# Altium PCB MCU.PcbDoc
Units mm, origin at the board's own origin, x right, y up, seen from the top; angles counter-clockwise.
Board outline 50 x 50.04 mm, 4 copper layers (Top Layer, Int1 (GND), Int2 (PWR), Bottom Layer), stack 1.369 mm thick; 49 components, 51 nets, 231 pads, 142 vias.
Unrouted connection lines stored in the file: 2.
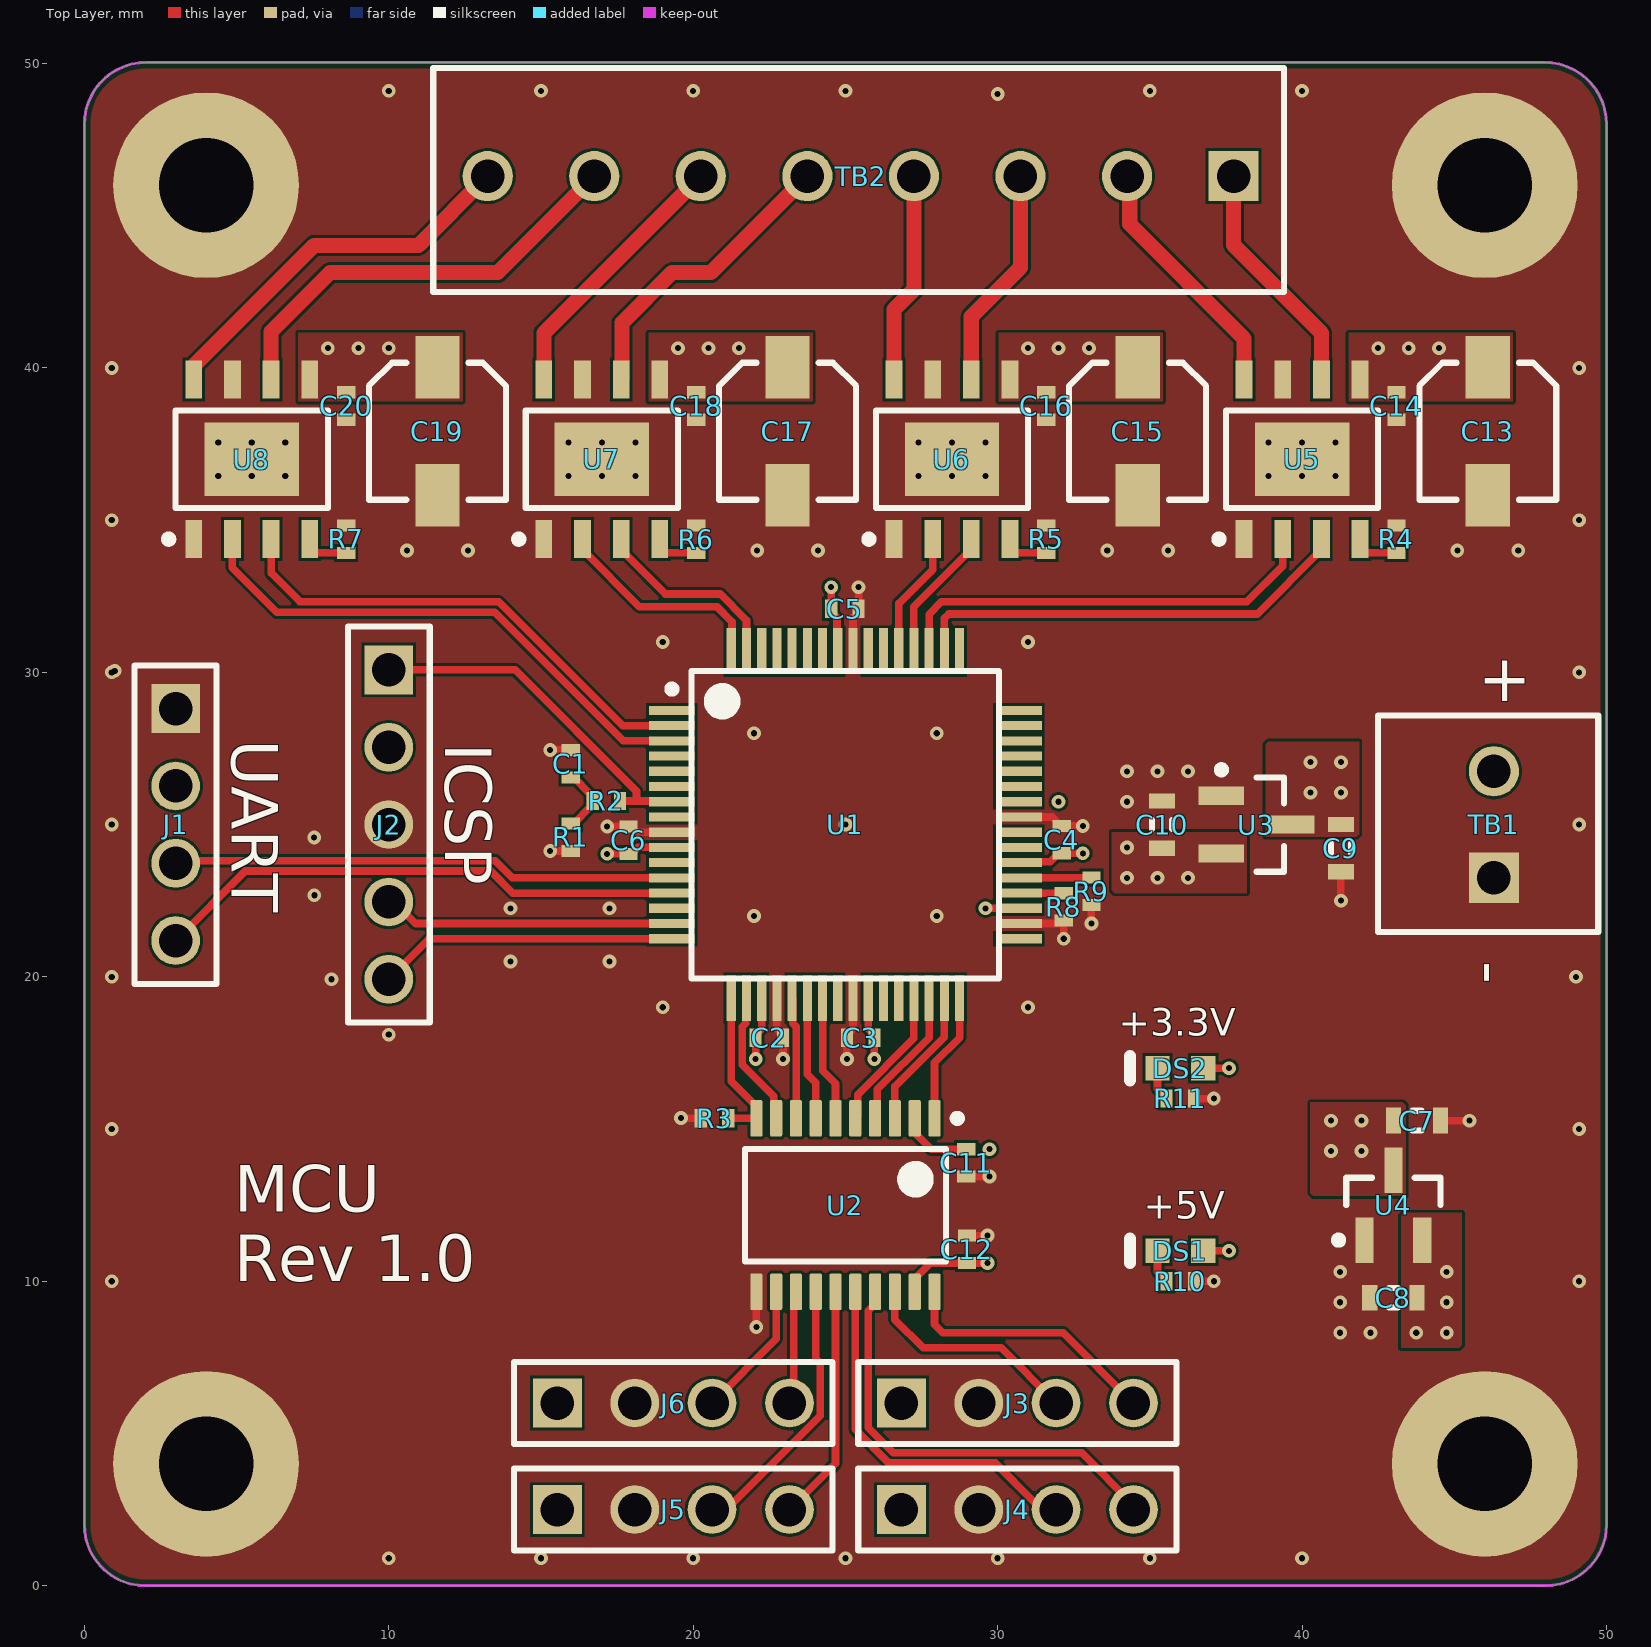
[diagram p0: Top Layer view]
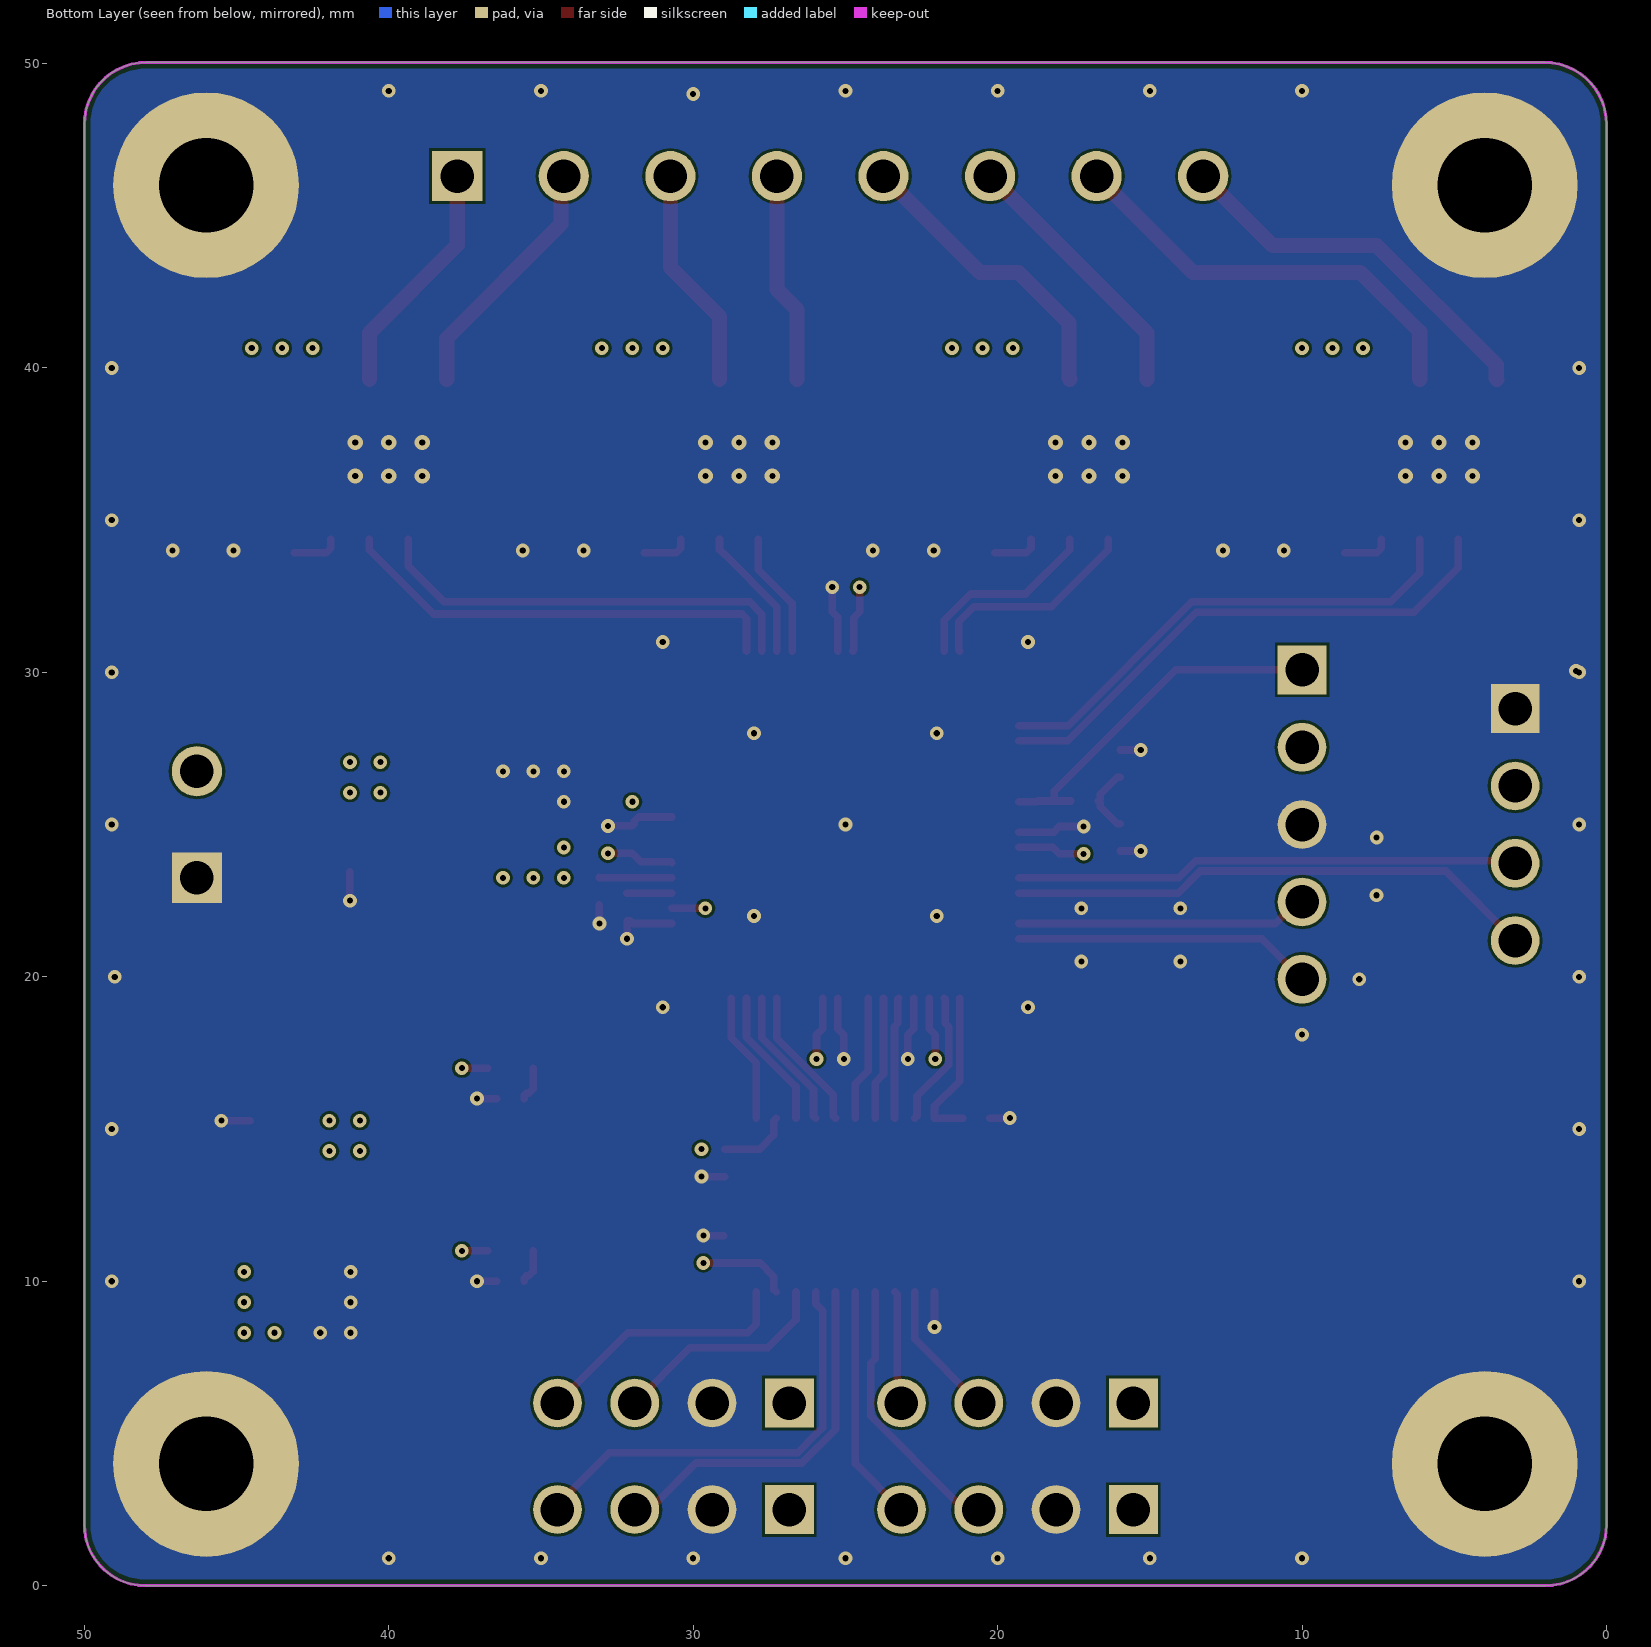
[diagram p1: Bottom Layer view, seen from below]
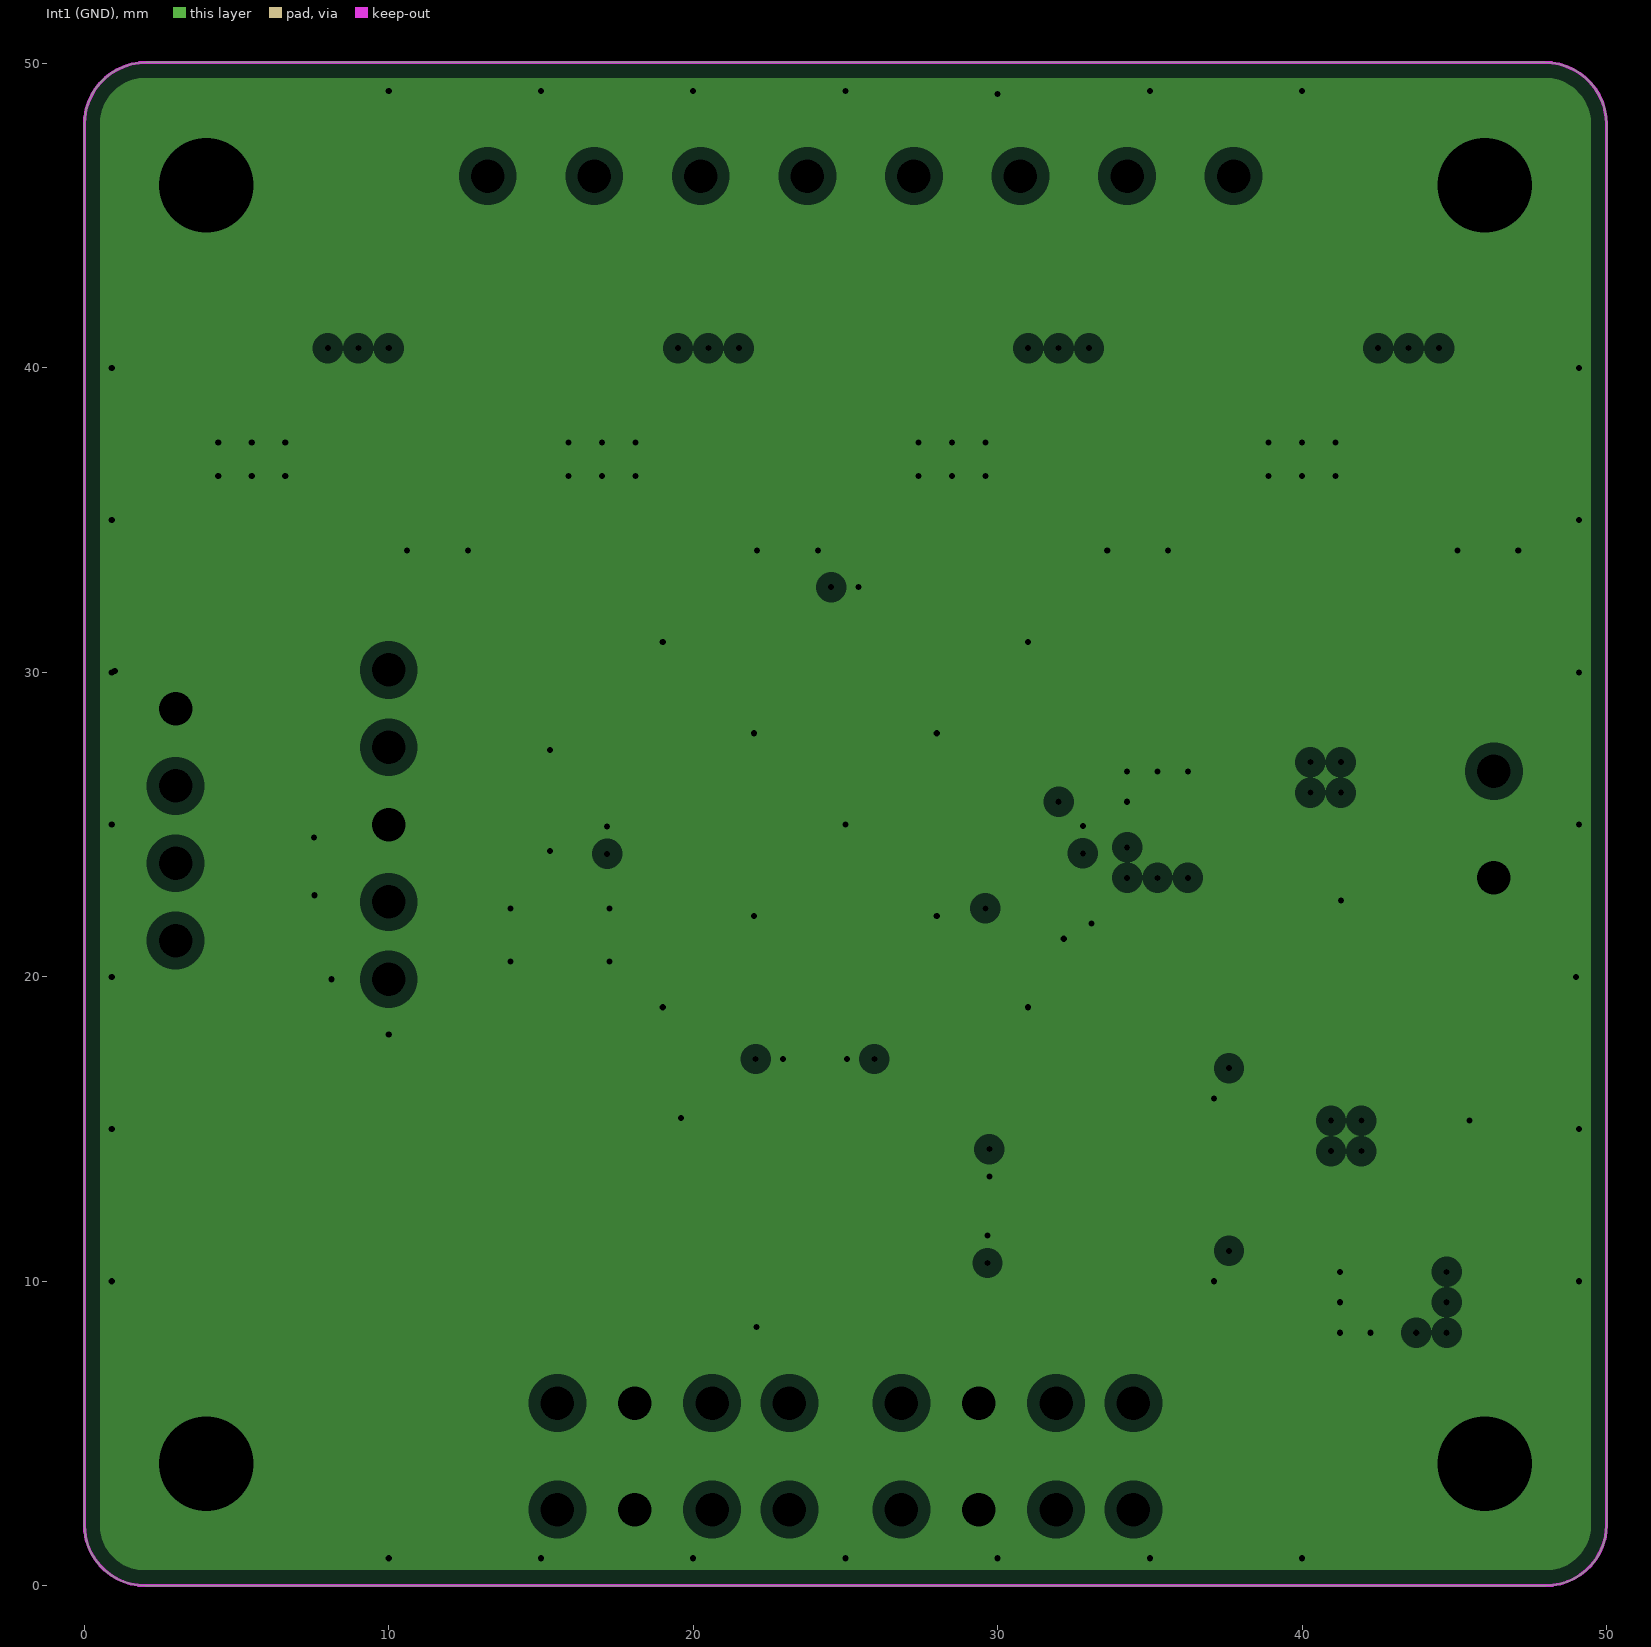
[diagram p2: Int1 (GND), clearances drawn from the general rule]
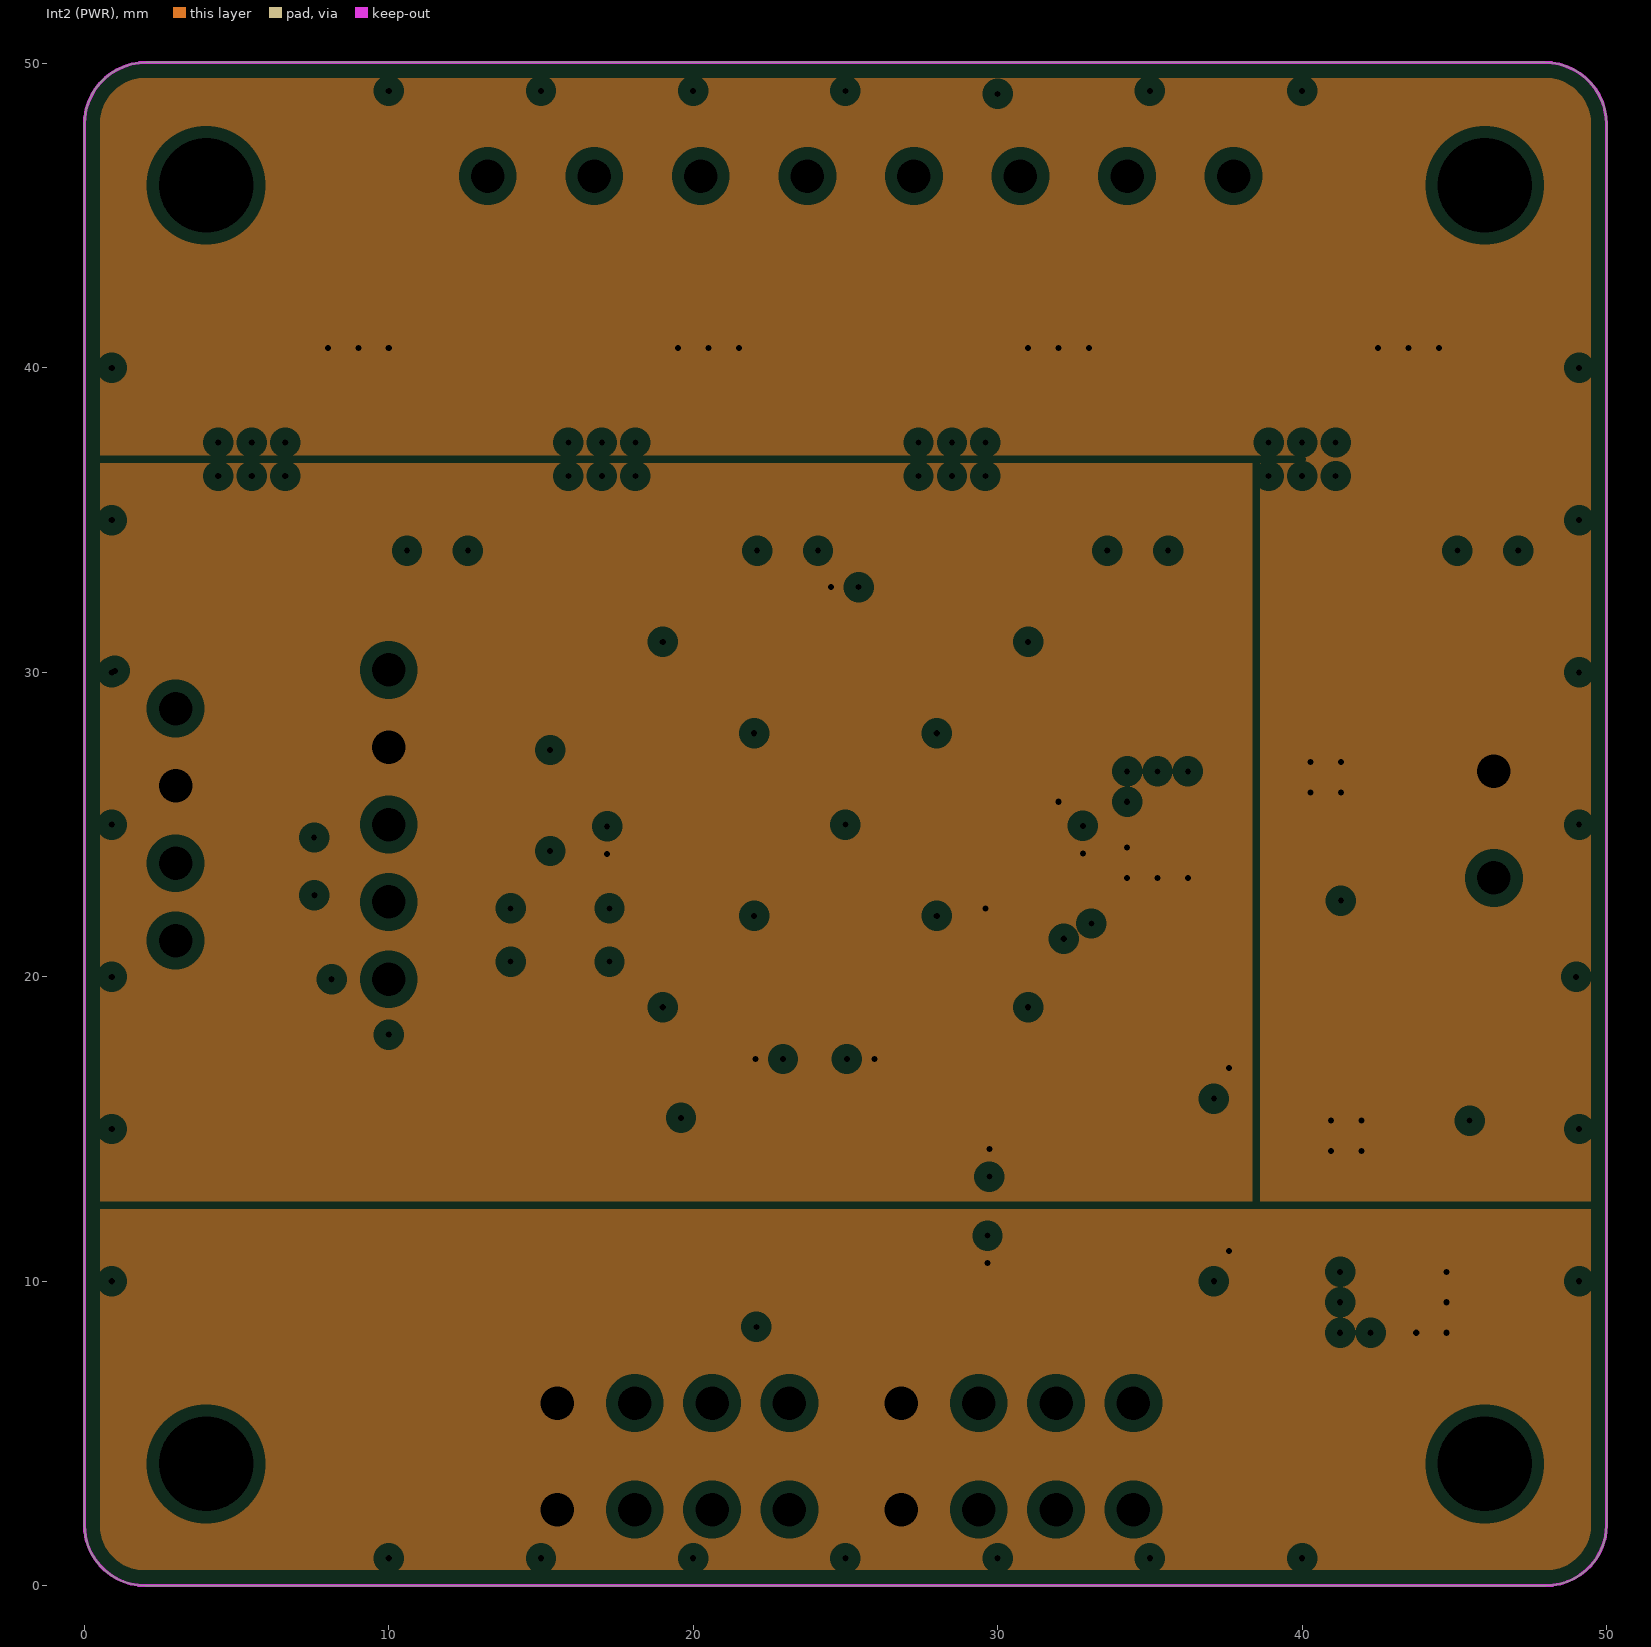
[diagram p3: Int2 (PWR), clearances drawn from the general rule]

## Layer stack, top to bottom
Top Solder: solder mask 0.0254, SM-001, Dk 4
Top Layer: signal copper 0.035
Dielectric 1: prepreg 0.1295, PP-017, Dk 4.3
Dielectric 2: prepreg 0.1295, PP-017, Dk 4.3
Int1 (GND): plane copper 0.035, net GND
Dielectric 3: core 0.7112, Core-039, Dk 4.8
Int2 (PWR): plane copper 0.035
Dielectric 4: prepreg 0.1295, PP-017, Dk 4.3
Dielectric 5: prepreg 0.1295, PP-017, Dk 4.3
Bottom Layer: signal copper 0.035
Bottom Solder: solder mask 0.0254, SM-001, Dk 4

## Board outline
2,0 48,0 ccw(c48,2) 50,2 50,48 ccw(c47.962,48) 47.962,50.038 2.038,50.038 ccw(c2.038,48) 0,48 0,2 ccw(c2,2)
cut-out: 0,6.925

## Design rules (kind name [scope] priority, off if disabled: settings)
BoardOutlineClearance [All] p1: gap=0.2 ignorepadtopadclearanceinfootprint=FALSE
Clearance [All] p1: gap=0.089 ignorepadtopadclearanceinfootprint=FALSE
DiffPairsRouting [All] p1: maxlimit=0.254 minlimit=0.089 mostfreqgap=0.089 toplayer_minwidth=0.089 toplayer_maxwidth=0.5 toplayer_prefwidth=0.25 bottomlayer_minwidth=0.089 bottomlayer_maxwidth=0.5 bottomlayer_prefwidth=0.25 maxuncoupledlength=0.1
HoleSize [All] p1: absolutevalues=TRUE maxlimit=6.3 minlimit=0.2 maxpercent=80.000 minpercent=20.000
MinimumAnnularRing [All] p1: minimumring=0.076
PlaneClearance [All] p1: clearance=0.4
PlaneConnect [All] p1: planeconnectstyle=Direct reliefexpansion=0.508 reliefentries=4 reliefconductorwidth=0.254 reliefairgap=0.254
PolygonConnect [All] p1: connectstyle=Direct reliefconductorwidth=0.254 reliefentries=4 polygonreliefangle="90 Angle" airgapwidth=0.254
RoutingVias [All] p1: holewidth=0.2 width=0.45 viastyle="Through Hole" minholewidth=0.2 minwidth=0.45 maxholewidth=0.711 maxwidth=1.27
SolderMaskExpansion SolderMaskExpansionVia [IsVia] p1: expansion=0.05 istentingtop=TRUE
SolderMaskExpansion [All] p2: expansion=0.05 istentingtop=FALSE
Width [All] p1: maxlimit=1.27 minlimit=0.089 preferedwidth=0.25
26 further rules are at their usual default settings.

## Classes and differential pairs
net class ENC[7..0]: ENC0 ENC1 ENC2 ENC3 ENC4 ENC5 ENC6 ENC7
component class Power: C7 C8 C9 C10 DS1 DS2 R10 R11 TB1 U3 U4
component class Motors: C13 C14 C15 C16 C17 C18 C19 C20 R4 R5 R6 R7 TB2 U5 U6 U7 U8
component class Encoders: C11 J3 J4 J5 J6 R3 U2
component class Microcontroller: C1 C2 C3 C4 C5 C6 J1 J2 R1 R2 R8 R9 U1

## Components (designator, comment, footprint, x,y, rotation, side; value= is the part's Value field where it differs from the comment)
C1 "100nF" 0402 15.975,27 r270 top
C2 "100nF" 0402 22.5,18 r180 top
C3 "100nF" 0402 25.5,18 r0 top
C4 "100nF" 0402 32.106,24.506 r270 top
C5 "100nF" 0402 24.983,32.089 r180 top
C6 "100nF" 0402 17.875,24.488 r270 top
C7 "1uF" 0603 43.775,15.275 r180 top
C8 "1uF" 0603 43,9.459 r0 top
C9 "1uF" 0603 41.275,24.225 r90 top
C10 "1uF" 0603 35.4,25 r270 top
C11 "100nF" 0402 28.967,13.887 r90 top
C12 "100nF" 0402 28.992,11.05 r270 top
C13 "EEE-FT1C470AR" EEE-FT1C470AR 46.1,37.92 r270 top locked
C14 "100nF" 0402 43.1,38.75 r90 top locked
C15 "EEE-FT1C470AR" EEE-FT1C470AR 34.6,37.92 r270 top locked
C16 "100nF" 0402 31.6,38.75 r90 top locked
C17 "EEE-FT1C470AR" EEE-FT1C470AR 23.1,37.92 r270 top locked
C18 "100nF" 0402 20.1,38.75 r90 top locked
C19 "EEE-FT1C470AR" EEE-FT1C470AR 11.6,37.92 r270 top locked
C20 "100nF" 0402 8.6,38.75 r90 top locked
DS1 "LTST-C191KGKT" LITE-ON-LTST-C191KRKT-2_V 36,11 r180 top
DS2 "LTST-C191KGKT" LITE-ON-LTST-C191KRKT-2_V 36,17 r180 top
J1 "61300411121" 61300411121 3,25 r270 top
J2 "61300511121" 61300511121 10,25 r270 top
J3 "61300411121" 61300411121 30.65,6 r0 top
J4 "61300411121" 61300411121 30.65,2.5 r0 top
J5 "61300411121" 61300411121 19.35,2.5 r0 top
J6 "61300411121" 61300411121 19.35,6 r0 top
R1 "10k" 0402 15.975,24.581 r270 top
R2 "1k" 0402 17.15,25.775 r0 top
R3 "10k" 0402 20.7,15.35 r0 top
R4 "30k" 0402 43.1,34.375 r270 top
R5 "30k" 0402 31.6,34.375 r270 top
R6 "30k" 0402 20.1,34.375 r270 top
R7 "30k" 0402 8.6,34.375 r270 top
R8 "10k" 0402 32.173,22.297 r90 top
R9 "10k" 0402 33.081,22.81 r90 top
R10 "150" 0402 36,10 r180 top
R11 "64.9" 0402 36,16 r180 top
TB1 "0393570002" 0393570002 46.3,23.25 r90 top
TB2 "0393570008" 0393570008 37.75,46.3 r180 top
U1 "PIC32MK1024MCF064T-I/MR" 64-TQFP 25,25 r0 top locked
U2 "TXB0108PWR" PW0020A_L 25,12.5 r270 top
U3 "MCP1702T-3302E/CB" SOT-23A-CB3_N 38.5,25 r0 top
U4 "MCP1702T-5002E/CB" SOT-23A-CB3_N 43,12.5 r90 top
U5 "DRV8871DDAR" 8-HSOP 40,37 r90 top locked
U6 "DRV8871DDAR" 8-HSOP 28.5,37 r90 top locked
U7 "DRV8871DDAR" 8-HSOP 17,37 r90 top locked
U8 "DRV8871DDAR" 8-HSOP 5.5,37 r90 top locked

## Footprints (in the part's own frame and the unit in brackets; to place one, negate y for a bottom-side part, rotate by r counter-clockwise, add the part's x,y. Pads: shape width x height; smd on the part's side, far side on the other; paste and mask are expansions set on the pad)
8-HSOP [mm] "HSOP, 8-Leads, Body 4.90x3.90mm, Pitch 1.27mm, Thermal Pad 3.10x2.40mm, IPC High Density"
  rect 1.25x0.55 smd: 1(-2.625,1.905) 2(-2.625,0.635) 3(-2.625,-0.635) 4(-2.625,-1.905) 5(2.625,-1.905) 6(2.625,-0.635) 7(2.625,0.635) 8(2.625,1.905)
  rect 2.4x3.1 smd: 9(0,0)
  silkscreen extent -2.75,-2.5 1.6,2.85, body extent -2,-2.5 2,2.5, height 1.7
64-TQFP [mm] "TSQFP, 64-Leads, Body 10.00x10.00mm, Pitch 0.50mm, IPC High Density"
  rect 1.5x0.3 smd: 1(-5.7,3.75) 2(-5.7,3.25) 3(-5.7,2.75) 4(-5.7,2.25) 5(-5.7,1.75) 6(-5.7,1.25) 7(-5.7,0.75) 8(-5.7,0.25) 9(-5.7,-0.25) 10(-5.7,-0.75) 11(-5.7,-1.25) 12(-5.7,-1.75) 13(-5.7,-2.25) 14(-5.7,-2.75) 15(-5.7,-3.25) 16(-5.7,-3.75) 33(5.7,-3.75) 34(5.7,-3.25) 35(5.7,-2.75) 36(5.7,-2.25) 37(5.7,-1.75) 38(5.7,-1.25) 39(5.7,-0.75) 40(5.7,-0.25) 41(5.7,0.25) 42(5.7,0.75) 43(5.7,1.25) 44(5.7,1.75) 45(5.7,2.25) 46(5.7,2.75) 47(5.7,3.25) 48(5.7,3.75)
  rect 0.3x1.5 smd: 17(-3.75,-5.7) 18(-3.25,-5.7) 19(-2.75,-5.7) 20(-2.25,-5.7) 21(-1.75,-5.7) 22(-1.25,-5.7) 23(-0.75,-5.7) 24(-0.25,-5.7) 25(0.25,-5.7) 26(0.75,-5.7) 27(1.25,-5.7) 28(1.75,-5.7) 29(2.25,-5.7) 30(2.75,-5.7) 31(3.25,-5.7) 32(3.75,-5.7) 49(3.75,5.7) 50(3.25,5.7) 51(2.75,5.7) 52(2.25,5.7) 53(1.75,5.7) 54(1.25,5.7) 55(0.75,5.7) 56(0.25,5.7) 57(-0.25,5.7) 58(-0.75,5.7) 59(-1.25,5.7) 60(-1.75,5.7) 61(-2.25,5.7) 62(-2.75,5.7) 63(-3.25,5.7) 64(-3.75,5.7)
  silkscreen extent -5.82,-5.05 5.05,5.05, body extent -5,-5 5,5, height 1.2
0402 [mm] "Chip Capacitor, 2-Leads, Body 1.00x0.50mm, IPC High Density"
  rect 0.4x0.6 smd: 1(-0.45,0) 2(0.45,0)
  body extent -0.53,-0.28 0.53,0.27, height 0.55
0603 [mm] "Chip Capacitor, 2-Leads, Body 1.60x0.80mm, IPC High Density"
  rect 0.5x0.85 smd: 1(-0.775,0) 2(0.775,0)
  silkscreen extent -0.15,-0.33 0.15,0.33, body extent -0.85,-0.45 0.85,0.45, height 0.9
0393570002 [mm] "TERM BLK 8POS SIDE ENT 3.5MM PCB"
  rect 1.65x1.65 hole 1.1: 1(0,0)
  round 1.65 hole 1.1: 2(3.5,0)
  silkscreen extent -1.78,-3.43 5.33,3.81, body extent -1.8,-3.44 5.31,3.85, height 8.51
0393570008 [mm] "TERM BLK 8POS SIDE ENT 3.5MM PCB"
  rect 1.65x1.65 hole 1.1: 1(0,0)
  round 1.65 hole 1.1: 2(3.5,0) 3(7,0) 4(10.5,0) 5(14,0) 6(17.5,0) 7(21,0) 8(24.5,0)
  silkscreen extent -1.65,-3.56 26.29,3.81, body extent -1.73,-3.47 26.21,3.82, height 8.51
61300411121 [mm] "Pin Header, pitch 2.54 mm, THT, Vertical, single row, 4p"
  rect 1.6x1.6 hole 1.1: 1(-3.81,0)
  round 1.6 hole 1.1: 2(-1.27,0) 3(1.27,0) 4(3.81,0)
  silkscreen extent -5.23,-1.35 5.23,1.35, body extent -5.08,-1.27 5.08,1.27, height 8.57
61300511121 [mm] "Pin Header, pitch 2.54 mm, THT, Vertical, single row, 5p"
  rect 1.6x1.6 hole 1.1: 1(-5.08,0)
  round 1.6 hole 1.1: 2(-2.54,0) 3(0,0) 4(2.54,0) 5(5.08,0)
  silkscreen extent -6.5,-1.35 6.5,1.35, body extent -6.35,-1.27 6.35,1.27, height 8.57
EEE-FT1C470AR [mm] "Aluminum Electrolytic Capacitor, Body 4.30x4.30x6.10mm, IPC High Density"
  rect 2.05x1.45 smd: 1(-2.1,0) 2(2.1,0)
  silkscreen extent -2.25,-2.25 2.25,2.25, body extent -2.25,-2.25 2.25,2.25, height 6.1
LITE-ON-LTST-C191KRKT-2_V [mm] "Chip, 2-Leads, Body 1.6x0.8mm"
  rect 0.8x0.8 smd: 1(-0.75,0) 2(0.75,0)
  silkscreen extent 1.65,-0.4 1.65,0.4, body extent -0.8,-0.4 0.8,0.4, height 0.55
PW0020A_L [mm] "SOP, 20-Leads, Body 6.6x4.5mm, Pitch 0.65mm, IPC High Density"
  rrect25% 1.2x0.4 smd: 1(-2.85,2.925) 2(-2.85,2.275) 3(-2.85,1.625) 4(-2.85,0.975) 5(-2.85,0.325) 6(-2.85,-0.325) 7(-2.85,-0.975) 8(-2.85,-1.625) 9(-2.85,-2.275) 10(-2.85,-2.925) 11(2.85,-2.925) 12(2.85,-2.275) 13(2.85,-1.625) 14(2.85,-0.975) 15(2.85,-0.325) 16(2.85,0.325) 17(2.85,0.975) 18(2.85,1.625) 19(2.85,2.275) 20(2.85,2.925)
  silkscreen extent -2.97,-3.3 1.85,3.8, body extent -3.21,-3.25 3.21,3.25, height 1
SOT-23A-CB3_N [mm] "SOT346, 3-Leads, Body 2.9x1.5mm, Pitch 0.95mm, Lead Span 2.6mm, IPC Medium Density"
  rect 1.5x0.6 smd: 1(-1.15,0.95) 2(-1.15,-0.95) 3(1.15,0)
  silkscreen extent -1.27,-1.55 0.9,1.92, body extent -0.9,-1.55 0.9,1.55, height 1.45

## Part data
C1 C2 C3 C4 C5 C6 C11 C12 C14 C16 C18 C20: library part C1005X7R1C104K050BC, "TDK - C1005X7R1C104K050BC. - CERAMIC CAPACITOR, 0.1UF, 16V, X7R, 10%, 0402, FULL REEL", Case Code (Imperial)=0402, Case Code (Metric)=1005, Dielectric=X7R, Dielectric Material=Ceramic, Manufacturer=TDK, Max Operating Temperature=125°C, Min Operating Temperature=-55°C, Package Quantity=1, Supplier Part Number 1=445-4952-1-ND, Tolerance=10%, Voltage=16V, Capacitance=100nF, Case/Package=0402, Category="Ceramic Capacitors", Composition=Ceramic, Depth=0.5mm, Height=0.5mm, Lead Free="Lead Free", Length=1mm, Manufacturer Part Number=C1005X7R1C104K050BC, Mount="Surface Mount", Number of Pins=2, Packaging="Tape and Reel", Part Name=C1005X7R1C104K050BC, Pricing 1="1=0.10000, 10=0.07500, 100=0.03350, 500=0.02390, 1000=0.01879, 2500=0.01708, 5000=0.01571 (USD)", Radiation Hardening=No, REACH SVHC=Unknown, RoHS=Yes, Stock 1=2957810, Supplier 1=Digi-Key, Termination=SMD/SMT, Thickness=0.022inch, Voltage Rating=16V, Voltage Rating (DC)=16V, Weight=2.3E-05oz, Width=0.02inch
C7 C8 C9 C10: library part C1608X7R1C105K080AC, "TDK - C1608X7R1C105K080AC - SMD Multilayer Ceramic Capacitor, 1 µF, 16 V, 0603 [1608 Metric], ± 10%, X7R, C Series TDK", Case Code (Imperial)=0603, Case Code (Metric)=1608, Dielectric=X7R, Dielectric Material=Ceramic, Manufacturer=TDK, Max Operating Temperature=125°C, Min Operating Temperature=-55°C, Package Quantity=1, Supplier Part Number 1=445-1604-1-ND, Tolerance=10%, Voltage=16V, Capacitance=1uF, Case/Package=0603, Category="Ceramic Capacitors", Composition=Ceramic, Depth=0.8mm, Height=0.8mm, Lead Free="Lead Free", Length=1.6mm, Manufacturer Part Number=C1608X7R1C105K080AC, Mount="Surface Mount", Packaging="Tape and Reel", Part Name=C1608X7R1C105K080AC, Pricing 1="1=0.15000, 10=0.10500, 100=0.04950, 500=0.03472, 1000=0.02875 (USD)", Radiation Hardening=No, REACH SVHC="No SVHC", RoHS=Yes, Stock 1=247756, Supplier 1=Digi-Key, Termination=SMD/SMT, Thickness=0.037inch, Voltage Rating=16V, Voltage Rating (DC)=16V, Weight=7.1E-05oz, Width=0.031inch
C13 C15 C17 C19: "PANASONIC - EEEFT1C470AR - SMD Aluminium Electrolytic Capacitor, Radial Can - SMD, 47 µF, 16 V, 0.85 ohm, FT Series", Capacitance=47uF, Case/Package=Radial, ESR (Equivalent Series Resistance)=850mR, Leakage Current=7.5uA, Manufacturer=Panasonic, Manufacturer Part Number=EEEFT1C470AR, Max Operating Temperature=105°C, Min Operating Temperature=-55°C, Package Quantity=2000, Ripple Current=160mA, Supplier Part Number 1=P15090CT-ND, Tolerance=20%, Voltage=16V, Category="Aluminum Electrolytic Capacitors", Contact Plating=Tin, Diameter=4mm, Height=5.8mm, Height - Seated (Max)=0.24inch, Lead Diameter=0.65mm, Lead Pitch=1mm, Length=5.8mm, Life (Hours)=2000Hour, Mount="Surface Mount", Packaging="Tape and Reel", Part Name=EEE-FT1C470AR, Polarity=Polar, Pricing 1="1=0.42000, 10=0.29800, 100=0.19590, 500=0.14514, 1000=0.12337 (USD)", Radiation Hardening=No, REACH SVHC="No SVHC", Ripple Current (AC)=160mA, RoHS=Yes, Stock 1=48806, Supplier 1=Digi-Key, Termination=SMD/SMT, Voltage Rating=16V, Voltage Rating (DC)=16V
DS1 DS2: library part CMP-2000-05198-1, "Chip LED, Green, 574 nm, 40 pF, -55 to 85 degC, 2-Pin SMD, RoHS, Tape and Reel", Emitting Color=YellowGreen, Forward Current=30mA, Forward Voltage=2.4V, Manufacturer=Lite-On, Operating Temp Range=-55Cto85C, Operating Temperature Classification=Industrial, Package Type=ChipLed, Power Dissipation=75W, Reverse Voltage=5V, Test Current (It)=20mA, Chip Material=AlGaInP, Datasheet URL=http://download.siliconexpert.com/pdfs/2007/08/26/semi_b/manual/lot/ds/ltst-c191kgkt.pdf, Datasheet Version=Jan-07, DELETED=Compliant, Dominant Wave Length=571nm, High Brightness=Yes, Lens Dimensions=1.1X0.8X0.37mm, Lum Intensity=35mcd, Luminous Intensity=35mcd, Main Category=ChipLED, Manufacturer URL=http://www.us.liteon.com/, Mounting=SurfaceMount, Number of Elements=1, Packaging=TapeandReel, Peak Wavelength=574nm, Pin Count=2, Product Depth (mm)=0.8mm, Product Height (mm)=0.55mm, Product Length (mm)=1.6mm, Rad Hardened=No, Shape Type=Rectangular, Type=Uni-Color, Viewing Angle=130deg
J1 J3 J4 J5 J6: library part CMP-1502-01064-1, "THT Vertical Pin Header WR-PHD, Pitch 2.54 mm, Single Row, 4 pins", Contact Resistance=20mOhm, Manufacturer="Wurth Elektronik", Operating Temperature=-40to105degC, Rated Current=3A, Withstanding Voltage=500VAC, Working Voltage=250VAC, Datasheet URL=https://katalog.we-online.de/em/datasheet/6130xx11121.pdf, Gender=Male, Manufacturer URL=http://www.we-online.de, Mounting Technology=THT, Orientation=Vertical, Package Reference=61300411121, Packaging=Bag, Part Number=61300411121, Pin Number=4, Pitch=2.54mm, Publisher=WurthElektronik, Row Number=Single
J2: library part CMP-1502-01068-1, "THT Vertical Pin Header WR-PHD, Pitch 2.54 mm, Single Row, 5 pins", Contact Resistance=20mOhm, Manufacturer="Wurth Elektronik", Operating Temperature=-40to105degC, Rated Current=3A, Withstanding Voltage=500VAC, Working Voltage=250VAC, Datasheet URL=https://katalog.we-online.de/em/datasheet/6130xx11121.pdf, Gender=Male, Manufacturer URL=http://www.we-online.de, Mounting Technology=THT, Orientation=Vertical, Package Reference=61300511121, Packaging=Bag, Part Number=61300511121, Pin Number=5, Pitch=2.54mm, Publisher=WurthElektronik, Row Number=Single
R1 R3 R8 R9: library part CRCW040210K0FKEDC, "D10/CRCW0402-C 100 10K 1% ET7", Case/Package=Molded, Manufacturer=Vishay, Max Operating Temperature=155°C, Min Operating Temperature=-55°C, Power Rating=62.5mW, Supplier Part Number 1=541-3959-6-ND, Temperature Coefficient=100ppm/°C, Tolerance=1%, Category=Resistors, Composition="Thick Film", Contact Plating=Tin, Lead Free="Lead Free", Length=1mm, Manufacturer Part Number=CRCW040210K0FKEDC, Part Name=CRCW040210K0FKEDC, Pricing 1="1=0.10000, 10=0.03200, 100=0.01300, 1000=0.00583, 2500=0.00506, 5000=0.00418 (USD)", Resistance=10k, RoHS=Yes, Stock 1=3541307, Supplier 1=Digi-Key, Termination=Wraparound
R2: library part CRCW04021K00FKED, "Res Thick Film 0402 1K Ohm 1% 1/16W ±100ppm/°C Molded SMD Paper T/R", Manufacturer="Vishay Dale", Supplier Part Number 1=541-1.00KLDKR-ND, Tolerance=1%, Category="Chip SMD Resistors", Manufacturer Part Number=CRCW04021K00FKED, Part Name=CRCW04021K00FKED, Pricing 1="1=0.10000, 10=0.03600, 100=0.01460, 1000=0.00657, 2500=0.00570, 5000=0.00471 (USD)", Resistance=1k, RoHS=Yes, Stock 1=767306, Supplier 1=Digi-Key
R4 R5 R6 R7: library part CRCW040230K0FKED, "Res Thick Film 0402 30K Ohm 1% 0.063W(1/16W) ±100ppm/C Molded SMD Automotive Paper T/R", Case Code (Imperial)=0402, Case Code (Metric)=1005, Manufacturer=Vishay, Max Operating Temperature=155°C, Max Power Dissipation=63mW, Min Operating Temperature=-55°C, Package Quantity=10000, Supplier Part Number 1=541-30.0KLCT-ND, Temperature Coefficient=100ppm/°C, Tolerance=1%, Voltage Rating=50V, Case/Package=0402, Category="Chip SMD Resistors", Composition="Thick Film", Contact Plating=Tin, Depth=0.5mm, Height=0.35mm, Lead Free="Lead Free", Length=1mm, Manufacturer Part Number=CRCW040230K0FKED, Military Standard=Not, Number of Terminations=2, Packaging="Tape and Reel", Part Name=CRCW040230K0FKED, Power Rating=63mW, Pricing 1="1=0.10000, 10=0.03600, 100=0.01460, 1000=0.00657, 2500=0.00570, 5000=0.00471 (USD)", Radiation Hardening=No, Resistance=30k, RoHS=Yes, Stock 1=3845, Supplier 1=Digi-Key, Termination=SMD/SMT, Voltage Rating (DC)=50V, Weight=2.3E-05oz, Width=0.5mm
R10: library part CRCW0402150RFKED, "Resistor;  Thick Film;  150 Ohms;  0.063 W;  1%;  SMT;  0402;  TCR 37 ppm/DegC", Manufacturer=Vishay, Supplier Part Number 1=52K6721, Tolerance=1%, Category="Chip SMD Resistors", Manufacturer Part Number=CRCW0402150RFKED, Part Name=CRCW0402150RFKED, Pricing 1="1=0.10000, 25=0.03700, 100=0.01500, 250=0.01300, 500=0.01000, 1000=0.00700, 2500=0.00600, 5000=0.00400 (USD)", Resistance=150, RoHS=Yes, Stock 1=40000, Supplier 1=Newark
R11: library part CRCW040264R9FKED, "VISHAY   CRCW040264R9FKED.   Surface Mount Chip Resistor, Thick Film, AEC-Q200 CRCW Series, 64.9 ohm, 63 mW,  1%, 50 V", Case/Package=0402, Manufacturer=Vishay, Supplier Part Number 1=541-64.9LCT-ND, Tolerance=1%, Category="Chip SMD Resistors", Manufacturer Part Number=CRCW040264R9FKED, Part Name=CRCW040264R9FKED, Pricing 1="1=0.10000, 10=0.03600, 100=0.01460, 1000=0.00657, 2500=0.00570, 5000=0.00471 (USD)", Resistance=64.9, RoHS=Yes, Stock 1=11517, Supplier 1=Digi-Key
TB1: "Conn Eurostyle Block 2 POS 3.5mm Solder ST Thru-Hole 17.5A/Contact Eurostyle™", Color=Black, Current=12A, Manufacturer=Molex, Max Operating Temperature=85°C, Max Supply Voltage (AC)=300V, Min Operating Temperature=-40°C, Supplier Part Number 1=WM7877-ND, Category="Terminal Blocks", ComponentLink1Description=https://datasheet.ciiva.com/6751/393590004-sd-6751377.pdf?src-supplier=Digi-Key, ComponentLink1URL=https://datasheet.ciiva.com/6751/393590004-sd-6751377.pdf?src-supplier=Digi-Key, Contact Material=Copper, Contact Plating=Tin, Depth=7.29mm, Housing Color=Black, Housing Material=Polyamide, Length=7mm, Manufacturer Part Number=0393570002, Max Voltage Rating (AC)=300V, Mount="Through Hole", Number of Contacts=2, Number of Levels=1, Number of Positions Per Level=2, Number of Rows=1, Orientation=Straight, Packaging=Bulk, Part Name=0393570002, Pitch=3.5mm, Plating=Nickel, Pricing 1="1=1.15000, 10=0.71800, 25=0.61400, 50=0.55200, 100=0.54050, 250=0.46000, 500=0.43700, 1000=0.39100, 5000=0.30590 (USD)", Radiation Hardening=No, RoHS=Yes, Stock 1=34753, Supplier 1=Digi-Key, Termination=Solder, Voltage=300V, Wire Gauge (Max)=28AWG, Wire Gauge (Min)=16AWG
TB2: "Conn Eurostyle Block 8 POS 3.5mm Solder ST Thru-Hole 17.5A/Contact", Color=Black, Current=12A, Manufacturer=Molex, Max Operating Temperature=85°C, Max Supply Voltage (AC)=300V, Min Operating Temperature=-30°C, Supplier Part Number 1=23-0393570008-ND, Category="Terminal Blocks", ComponentLink1Description=http://components.arrow.com/part/dataview/0323_07191186?src-supplier=Arrow+Europe, ComponentLink1URL=http://components.arrow.com/part/dataview/0323_07191186?src-supplier=Arrow+Europe, ComponentLink2Description=http://components.arrow.com/part/dataview/42878979S8737925N3303?src-supplier=Arrow, ComponentLink2URL=http://components.arrow.com/part/dataview/42878979S8737925N3303?src-supplier=Arrow, Contact Material=Copper, Contact Plating=Tin, Depth=7.29mm, Housing Color=Black, Housing Material=Polyamide, Length=28mm, Manufacturer Part Number=0393570008, Max Voltage Rating (AC)=300V, Mount="Through Hole", Number of Contacts=8, Number of Levels=1, Number of Positions Per Level=8, Number of Rows=1, Orientation=Straight, Packaging=Bulk, Part Name=0393570008, Pitch=3.5mm, Plating=Nickel, Pricing 1="1=3.02000, 10=2.29800, 25=2.15280, 50=1.91360, 100=1.87200, 250=1.72640, 500=1.56000, 1000=1.38320, 5000=1.30000 (USD)", Radiation Hardening=No, RoHS=Yes, Stock 1=351, Supplier 1=Digi-Key, Termination=Solder, Voltage=300V, Wire Gauge (Max)=28AWG, Wire Gauge (Min)=16AWG
U1: library part PIC32MK1024MCF064-I/PT, "IC MCU 32BIT 1MB FLASH 64TQFP", Manufacturer=Microchip, Supplier Part Number 1=PIC32MK1024MCF064-I/PT-ND, Category=Microcontrollers, ComponentLink1Description=http://www.farnell.com/datasheets/2302007.pdf?src-supplier=Farnell, ComponentLink1URL=http://www.farnell.com/datasheets/2302007.pdf?src-supplier=Farnell, ComponentLink2Description=http://www.microchip.com/mymicrochip/filehandler.aspx?ddocname=en597535&src-supplier=Digi-Key, ComponentLink2URL=http://www.microchip.com/mymicrochip/filehandler.aspx?ddocname=en597535&src-supplier=Digi-Key, Manufacturer Part Number=PIC32MK1024MCF064-I/PT, Part Name=PIC32MK1024MCF064-I/PT, Pricing 1="1=7.30000, 25=6.70000, 100=6.06000 (USD)", RoHS=No, Stock 1=2, Supplier 1=Digi-Key
U2: library part CMP-2000-07337-1, "TXB0108 8-Bit Bidirectional Voltage-Level Translator with Auto-Direction Sensing and / +/- 15-kV ESD Protection, 1.2 to 3.6 V, -40 to 85 degC, 20-Pin TSSOP (PW), Green (RoHS & no Sb/Br), Tape and Reel", Manufacturer="Texas Instruments", Operating Temperature=-40°C~85°C, Package / Case="20-TSSOP(0.173\",4.40mmWidth)", Package Description="20-Pin Small Outline Package Integrated Circuit, Body 6.5 x 4.4 mm, Pitch 0.65 mm", Package Reference=PW20, Package Version="4040064-5/G, 02/2011", Standard Package=1, Supplier Device Package=20-TSSOP, Voltage - Supply=1.2V~3.6V,1.65V~5.5V, Category=IntegratedCircuits(ICs), Data Rate=100Mbps, Datasheet URL=http://www.ti.com/general/docs/lit/getliterature.tsp?genericPartNumber=TXB0108&fileType=pdf, Datasheet Version="Rev. F, 12/2014", Differential - Input=Output:No/No, Dynamic Catalog=TXBSeries, Family=Logic-Translators, Input Type=Logic, Logic Function=Translator,Bidirectional, Manufacturer URL=http://www.ti.com/, Mounting Technology=SurfaceMount, Number of Bits=8, Number of Channels=8, Number of Outputs/Channel=1, Other Names=296-21527-6, Output Type=Logic, Package URL=http://www.ti.com/litv/pdf/mpds362, Packaging=Digi-Reel®, Product Training Modules=VoltageLevelTranslation, Propagation Delay (Max)=4ns, Series=-
U3: library part CMP-0136-00799-1, "250 mA Low Quiescent Current LDO Regulator, 3-Pin SOT-23A, Extended Temperature, Tape and Reel", DatasheetVersion="revD, Jun-2009", PackageDescription="3-Lead Plastic Small Outline Transistor (CB) [SOT-23A]", PackageReference=SOT-23A-CB3, PackageVersion="revBB, Aug-2009"
U4: library part CMP-0136-00808-1, "250 mA Low Quiescent Current LDO Regulator, 3-Pin SOT-23A, Extended Temperature, Tape and Reel", DatasheetVersion="revD, Jun-2009", PackageDescription="3-Lead Plastic Small Outline Transistor (CB) [SOT-23A]", PackageReference=SOT-23A-CB3, PackageVersion="revBB, Aug-2009"
U5 U6 U7 U8: "IC BRUSHED DC MOTOR 8SOIC", Manufacturer="Texas Instruments", Max Operating Temperature=125°C, Max Output Current=3.6A, Min Operating Temperature=-40°C, Supplier Part Number 1=296-43024-1-ND, Category="Embedded Processors and Controllers", ComponentLink1Description=http://www.ti.com/lit/pdf/slyb165?src-supplier=Digi-Key, ComponentLink1URL=http://www.ti.com/lit/pdf/slyb165?src-supplier=Digi-Key, ComponentLink2Description=http://www.ti.com/lit/ds/symlink/drv8871.pdf?src-supplier=Digi-Key, ComponentLink2URL=http://www.ti.com/lit/ds/symlink/drv8871.pdf?src-supplier=Digi-Key, Fault Protection="Over Temperature", Interface=PWM, Lead Free="Lead Free", Manufacturer Part Number=DRV8871DDAR, Mount="Surface Mount", Packaging="Tape and Reel", Part Name=DRV8871DDAR, Pricing 1="1=1.87000, 10=1.67900, 25=1.58360, 100=1.26690, 250=1.10852, 500=1.07686, 1000=0.85516 (USD)", RoHS=Yes, Stock 1=10035, Supplier 1=Digi-Key

## Free pads (board coordinates)
  round 6.1 hole 3.1: ""(4,4) ""(4,46) ""(46,4) ""(46,46)

## Via types
v1: diameter 0.45, hole 0.2, Top Layer to Bottom Layer, tented both sides, 118 vias
v2: diameter 0.5, hole 0.2, Top Layer to Bottom Layer, tented both sides, 24 vias

## Nets (pads, with @x,y where several pads share a name; then routed paths per layer and width w, separated by ;. In a path a pad name is that pad's centre, name@x,y a point inside that pad or via, vN(x,y) a via of type N, cw(c..) or ccw(c..) an arc to the next point about the centre after c; other vN are vias at no path point)
+3.3V: C2.2 C3.2 C4.2 C5.2 C6.2 C10.2 C11.2 DS2.1 J1.2 J2.2 U1.10 U1.19 U1.26 U1.35 U1.38 U1.42 U1.57 U2.2 U3.2 | length 15.1
  Top Layer w0.25: v1(17.175,24.038) C6.2 17.975,24.038 18.187,24.25 U1.10 ; v1(22.05,17.3) C2.2 22.05,18.1 22.25,18.3 U1.19 ; v1(24.533,32.8) C5.2 24.533,31.989 24.725,31.797 24.725,30.725 U1.57 ; U1.26 25.75,18.3 25.95,18.1 C3.2 v1(25.95,17.3) ; U2.2 27.35,15.275 27.35,14.805 27.818,14.337 C11.2 ; v1(29.6,22.25) U1.35 ; U1.38 30.725,23.775 31.725,23.775 32.006,24.056 C4.2 v1(32.8,24.056) ; DS2.1 v1(37.6,17)
  other v1: 29.73,14.337 34.25,23.25 35.25,23.25 36.25,23.25 34.25,24.25 32,25.75
+5V: C8.2 C12.2 DS1.1 J3.1 J4.1 J5.1 J6.1 U2.19 U4.2 | length 3.9
  Top Layer w0.25: U2.19 27.35,9.725 27.35,10.148 27.802,10.6 C12.2 v1(29.667,10.6) ; DS1.1 v1(37.6,11)
  other v1: 43.75,8.309 44.75,8.309 44.75,9.309 44.75,10.309
+VIN: C7.2 C9.2 C13.1 C14.2 C15.1 C16.2 C17.1 C18.2 C19.1 C20.2 TB1.2 U3.3 U4.3 U5.5 U6.5 U7.5 U8.5
  other v1: 40.95,14.275 41.95,14.275 40.95,15.275 41.95,15.275 40.275,26.05 41.275,26.05 40.275,27.05 41.275,27.05 8,40.65 9,40.65 10,40.65 19.5,40.65 20.5,40.65 21.5,40.65 31,40.65 32,40.65 33,40.65 42.5,40.65 43.5,40.65 44.5,40.65
EN0_A: J3.3 U2.18 | length 7.3
  Top Layer w0.25: U2.18 26.625,8.736 27.552,7.809 30.111,7.809 J3.3
EN0_B: J3.4 U2.20 | length 8.7
  Top Layer w0.25: U2.20 27.925,8.586 28.202,8.309 32.151,8.309 J3.4
EN1_A: J4.3 U2.16 | length 12.2
  Top Layer w0.25: U2.16 25.325,5.133 26.429,4.029 29.917,4.029 31.188,2.758 31.662,2.758 J4.3
EN1_B: J4.4 U2.17 | length 14.5
  Top Layer w0.25: U2.17 25.975,9.25 25.9,9.175 25.896,9.175 25.75,9.029 25.75,5.187 25.951,4.986 26.569,4.368 32.757,4.368 34.46,2.665 J4.4
EN2_A: J5.3 U2.14 | length 9
  Top Layer w0.25: J5.3 20.878,2.758 21.352,2.758 24.174,5.58 24.174,7.303 24.025,7.452 U2.14
EN2_B: J5.4 U2.15 | length 7.8
  Top Layer w0.25: J5.4 24.675,4.015 U2.15
EN3_A: J6.3 U2.12 | length 4.5
  Top Layer w0.25: J6.3 22.725,8.105 U2.12
EN3_B: J6.4 U2.13 | length 3.7
  Top Layer w0.25: J6.4 23.3,6.14 23.3,9.575 U2.13
ENC0: U1.32 U2.1 | length 4.3
  Top Layer w0.25: U2.1 27.925,17.173 28.75,17.998 U1.32
ENC1: U1.31 U2.3 | length 4.6
  Top Layer w0.25: U2.3 26.625,16.396 28.25,18.021 U1.31
ENC2: U1.30 U2.4 | length 4.7
  Top Layer w0.25: U2.4 26.05,15.425 26.05,16.3 27.75,18 U1.30
ENC3: U1.29 U2.5 | length 4.7
  Top Layer w0.25: U2.5 25.4,15.425 25.4,16.129 27.25,17.979 U1.29
ENC4: U1.23 U2.6 | length 4.1
  Top Layer w0.25: U1.23 24.25,16.908 24.675,16.483 U2.6
ENC5: U1.22 U2.7 | length 4.1
  Top Layer w0.25: U1.22 23.75,16.8 24.025,16.525 U2.7
ENC6: U1.21 U2.8 | length 4
  Top Layer w0.25: U1.21 23.275,19.275 23.275,18.477 23.389,18.364 23.389,15.364 U2.8
ENC7: U1.18 U2.9 | length 4.5
  Top Layer w0.25: U1.18 21.725,19.275 21.725,18.478 21.611,18.364 21.611,17.118 22.65,16.079 22.65,15.425 U2.9
GND: C1.1 C2.1 C3.1 C4.1 C5.1 C6.1 C7.1 C8.1 C9.1 C10.1 C11.1 C12.1 C13.2 C14.1 C15.2 C16.1 C17.2 C18.1 C19.2 C20.1 J1.1 J2.3 J3.2 J4.2 J5.2 J6.2 pad. R1.2 R3.1 R4.1 R5.1 R6.1 R7.1 R8.1 R9.1 R10.1 R11.1 TB1.1 U1.9 U1.20 U1.25 U1.34 U1.41 U1.56 U2.11 U3.1 U4.1 U5.1 U5.7 U5.9 U6.1 U6.7 U6.9 U7.1 U7.7 U7.9 U8.1 U8.7 U8.9 | length 21.3
  Top Layer w0.25: v1(15.3,24.131) R1.2 ; v1(15.3,27.45) C1.1 ; v1(17.175,24.938) C6.1 17.975,24.938 18.163,24.75 U1.9 ; v1(19.6,15.364) 19.607,15.357 20.243,15.357 R3.1 ; v1(22.075,8.5) U2.11 ; U1.20 22.75,18.3 22.95,18.1 C2.1 v1(22.95,17.3) ; v1(25.05,17.3) C3.1 25.05,18.1 25.25,18.3 U1.25 ; U1.56 25.25,31.806 25.433,31.989 C5.1 v1(25.433,32.8) ; C11.1 v1(29.73,13.437) ; C12.1 v1(29.667,11.5) ; U1.34 31.976,21.75 32.072,21.846 R8.1 v1(32.171,21.25) ; U1.41 31.785,25.25 31.931,25.104 31.931,25.031 32.006,24.956 C4.1 v1(32.8,24.956) ; v1(33.081,21.75) R9.1 ; R10.1 v1(37.1,10) ; R11.1 v1(37.1,16) ; v1(41.275,22.5) C9.1 ; C7.1 v1(45.5,15.275)
  other v1: 10,0.9 15,0.9 20,0.9 25,0.9 30,0.9 35,0.9 40,0.9 41.25,8.309 42.25,8.309 41.25,9.309 0.9,10 49.1,10 41.25,10.309 0.9,15 49.1,15 10,18.1 19,19 31,19 8.122,19.92 0.9,20 49,20 14,20.5 17.25,20.5 22,22 28,22 14,22.25 17.25,22.25 7.555,22.679 7.55,24.576 0.9,25 25,25 49.1,25 34.25,25.75 34.25,26.75 35.25,26.75 36.25,26.75 22,28 28,28 0.9,30 49.1,30 1,30.05 19,31 31,31 10.6,34 12.6,34 22.1,34 24.1,34 33.6,34 35.6,34 45.1,34 47.1,34 0.9,35 49.1,35 0.9,40 49.1,40 30,49 10,49.1 15,49.1 20,49.1 25,49.1 35,49.1 40,49.1
  other v2: 4.4,36.45 5.5,36.45 6.6,36.45 15.9,36.45 17,36.45 18.1,36.45 27.4,36.45 28.5,36.45 29.6,36.45 38.9,36.45 40,36.45 41.1,36.45 4.4,37.55 5.5,37.55 6.6,37.55 15.9,37.55 17,37.55 18.1,37.55 27.4,37.55 28.5,37.55 29.6,37.55 38.9,37.55 40,37.55 41.1,37.55
M0_IN1: U1.50 U5.3 | length 14.7
  Top Layer w0.25: U1.50 28.25,31.77 28.396,31.916 38.526,31.916 40.635,34.025 U5.3
M0_IN2: U1.51 U5.2 | length 14.4
  Top Layer w0.25: U1.51 27.75,31.914 28.15,32.314 38.186,32.314 39.365,33.493 U5.2
M0_OUT1: TB2.1 U5.6 | length 7.9
  Top Layer w0.5: TB2.1 37.75,44.035 40.635,41.15 U5.6
M0_OUT2: TB2.2 U5.8 | length 8.3
  Top Layer w0.5: TB2.2 34.34,46.21 34.34,44.725 38.095,40.97 U5.8
M1_IN1: U1.52 U6.3 | length 4.5
  Top Layer w0.25: U1.52 27.25,32.158 28.967,33.875 28.985,33.875 29.135,34.025 U6.3
M1_IN2: U1.53 U6.2 | length 4.1
  Top Layer w0.25: U1.53 26.75,32.26 27.865,33.375 U6.2
M1_OUT1: TB2.3 U6.6 | length 7.3
  Top Layer w0.5: U6.6 29.135,41.685 30.75,43.3 TB2.3
M1_OUT2: TB2.4 U6.8 | length 6.9
  Top Layer w0.5: U6.8 26.595,41.92 27.25,42.575 TB2.4
M2_IN1: U1.63 U7.3 | length 6.4
  Top Layer w0.25: U7.3 17.635,34.025 19.085,32.575 20.889,32.575 21.75,31.714 U1.63
M2_IN2: U1.64 U7.2 | length 7.2
  Top Layer w0.25: U7.2 16.365,34.025 18.232,32.158 20.782,32.158 21.274,31.666 21.274,30.724 U1.64
M2_OUT1: TB2.5 U7.6 | length 10
  Top Layer w0.5: U7.6 17.66,39.65 17.66,41.48 19.31,43.13 20.58,43.13 TB2.5
M2_OUT2: TB2.6 U7.8 | length 8.8
  Top Layer w0.5: U7.8 15.095,41.145 TB2.6
M3_IN1: U1.2 U8.3 | length 16.4
  Top Layer w0.25: U8.3 6.135,33.265 7.086,32.314 13.617,32.314 17.681,28.25 U1.2
M3_IN2: U1.3 U8.2 | length 17.7
  Top Layer w0.25: U8.2 4.865,33.435 6.325,31.975 7.529,31.975 13.476,31.975 17.701,27.75 U1.3
M3_OUT1: TB2.7 U8.6 | length 14.3
  Top Layer w0.5: U8.6 6.135,41.187 8.078,43.13 13.58,43.13 TB2.7
M3_OUT2: TB2.8 U8.8 | length 12.7
  Top Layer w0.5: U8.8 3.62,39.65 3.62,40.095 7.55,44.025 10.975,44.025 TB2.8
M\C\L\R\: J2.1 R2.2 U1.7 | length 11.8
  Top Layer w0.25: J2.1 14.148,30.08 18.137,26.09 18.137,25.775 ; R2.2 18.137,25.775 ; U1.7 18.7,25.75 18.675,25.775 18.137,25.775
NetC1_2: C1.2 R1.1 R2.1 | length 2.2
  Top Layer w0.25: R1.1 16.075,25.031 16.625,25.581 16.625,25.7 R2.1 16.625,25.85 16.625,26 16.075,26.55 C1.2
NetDS1_2: DS1.2 R10.2 | length 1.2
  Top Layer w0.25: DS1.2 35.25,10.321 35.396,10.175 35.475,10.175 35.55,10.1 R10.2
NetDS2_2: DS2.2 R11.2 | length 1.2
  Top Layer w0.25: DS2.2 35.25,16.321 35.396,16.175 35.475,16.175 35.55,16.1 R11.2
NetR4_2: R4.2 U5.4 | length 1.6
  Top Layer w0.25: U5.4 41.905,34.075 42.055,33.925 R4.2
NetR5_2: R5.2 U6.4 | length 1.6
  Top Layer w0.25: U6.4 30.405,34.075 30.555,33.925 R5.2
NetR6_2: R6.2 U7.4 | length 1.6
  Top Layer w0.25: U7.4 18.905,34.075 19.055,33.925 R6.2
NetR7_2: R7.2 U8.4 | length 1.6
  Top Layer w0.25: U8.4 7.405,34.075 7.555,33.925 R7.2
NetR8_2: R8.2 U1.36 | length 1.5
  Top Layer w0.25: U1.36 30.701,22.749 R8.2 R8.2
NetR9_2: R9.2 U1.37 | length 2.4
  Top Layer w0.25: U1.37 30.705,23.255 33.075,23.255 R9.2
OE: R3.2 U1.17 U2.10 | length 5.2
  Top Layer w0.25: R3.2 U2.10 22.075,15.75 21.25,16.575 U1.17
PGC1: J2.5 U1.16 | length 9.9
  Top Layer w0.25: J2.5 11.33,21.25 U1.16
PGD1: J2.4 U1.15 | length 9.6
  Top Layer w0.25: J2.4 10.171,22.46 10.881,21.75 U1.15
RX: J1.3 U1.12 | length 16.6
  Top Layer w0.25: J1.3 3.084,23.814 13.49,23.814 14.054,23.25 U1.12
TX: J1.4 U1.13 | length 17.5
  Top Layer w0.25: J1.4 5.285,23.475 13.35,23.475 14.075,22.75 U1.13
pads on no net: U1.1 U1.4 U1.5 U1.6 U1.8 U1.11 U1.14 U1.24 U1.27 U1.28 U1.33 U1.39 U1.40 U1.43 U1.44 U1.45 U1.46 U1.47 U1.48 U1.49 U1.54 U1.55 U1.58 U1.59 U1.60 U1.61 U1.62

## Polygon pours and split planes (outlines as drawn)
GND on Top Layer "GND_L01_P146" (solid, remove dead copper, pour order 146): 0,0 50,0 50,50 0,50
+VIN on Top Layer "+VIN_L01_P145" (solid, pour order 145): 41.875,27.725 38.8,27.725 38.8,24.6 41.875,24.6
+VIN on Top Layer "+VIN_L01_P144" (solid, pour order 144): 40.275,15.875 40.275,12.8 43.4,12.8 43.4,15.875
GND on Top Layer "GND_L01_P143" (solid, pour order 143): 40.75,7.809 42.75,7.809 42.75,12.245 40.75,12.245
+5V on Top Layer "+5V_L01_P142" (solid, pour order 142): 43.25,7.809 45.25,7.809 45.25,12.245 43.25,12.245
GND on Top Layer "GND_L01_P141" (solid, pour order 141): 33.75,27.25 33.75,25.25 38.186,25.25 38.186,27.25
+3.3V on Top Layer "+3.3V_L01_P140" (solid, pour order 140): 33.75,24.75 33.75,22.75 38.186,22.75 38.186,24.75
+VIN on Top Layer "+VIN_L01_P139" (solid, pour order 139): 12.425,41.15 7.032,41.15 7.032,38.897 12.425,38.897
+VIN on Top Layer "+VIN_L01_P138" (solid, pour order 138): 23.925,41.15 18.532,41.15 18.532,38.897 23.925,38.897
+VIN on Top Layer "+VIN_L01_P137" (solid, pour order 137): 35.425,41.15 30.032,41.15 30.032,38.897 35.425,38.897
+VIN on Top Layer "+VIN_L01_P135" (solid, pour order 135): 46.925,41.15 41.532,41.15 41.532,38.897 46.925,38.897
GND on Bottom Layer "GND_L04_P147" (solid, remove dead copper, pour order 147): 0,0 50,0 50,50 0,50
GND on Int1 (GND) (split plane): 48.112,49.528 48.408,49.469 48.686,49.354 48.936,49.187 49.149,48.974 49.316,48.724 49.431,48.446 49.49,48.15 49.49,48 49.49,2 49.49,1.853 49.432,1.566 49.32,1.294 49.157,1.05 48.95,0.843 48.706,0.68 48.434,0.568 48.147,0.51 1.853,0.51 1.566,0.568 1.294,0.68 1.05,0.843 0.843,1.05 0.68,1.294 0.568,1.566 0.51,1.853 0.51,2 0.51,48 0.51,48.15 0.569,48.446 0.684,48.724 0.851,48.974 1.064,49.187 1.314,49.354 1.592,49.469 1.888,49.528 2.038,49.528 47.962,49.528
+VIN on Int2 (PWR) (split plane): 48.112,49.528 48.408,49.469 48.686,49.354 48.936,49.187 49.149,48.974 49.316,48.724 49.431,48.446 49.49,48.15 49.49,48 49.49,12.627 38.627,12.627 38.627,36.873 40,36.873 40.049,36.882 40.09,36.91 40.118,36.951 40.127,37 40.118,37.049 40.09,37.09 40.049,37.118 40,37.127 0.51,37.127 0.51,48 0.51,48.15 0.569,48.446 0.684,48.724 0.851,48.974 1.064,49.187 1.314,49.354 1.592,49.469 1.888,49.528 2.038,49.528 47.962,49.528
+5V on Int2 (PWR) (split plane): 49.49,2 49.49,1.853 49.432,1.566 49.32,1.294 49.157,1.05 48.95,0.843 48.706,0.68 48.434,0.568 48.147,0.51 1.853,0.51 1.566,0.568 1.294,0.68 1.05,0.843 0.843,1.05 0.68,1.294 0.568,1.566 0.51,1.853 0.51,2 0.51,12.373 49.49,12.373
+3.3V on Int2 (PWR) (split plane): 38.373,12.627 0.51,12.627 0.51,36.873 38.373,36.873

## Keep-outs
Keep-Out Layer:
  the board outline again, w0.1

## Other copper
Int2 (PWR) (plane layer: these items are gaps in the copper):
  lines w0.25: 0,12.5 50,12.5 ; 0,37 40,37 ; 38.5,12.5 38.5,37

## Silkscreen, mask and mechanical layers (free items; w line width, h text height)
Top Overlay:
  text "+" at 45.792,29.05 h1.52
  text "UART" at 4.85,27.793 h1.52 r270
  text "ICSP" at 11.854,27.666 h1.52 r270
  text "-" at 45.492,20.508 h1.52 r270
  text "+3.3V" at 33.976,18.06 h0.9
  text "+5V" at 34.8,12.06 h0.9
  text "MCU / Rev 1.0" at 4.926,10 h1.52